# EAGLE board VacuumBox (EAGLE 7.2.0)
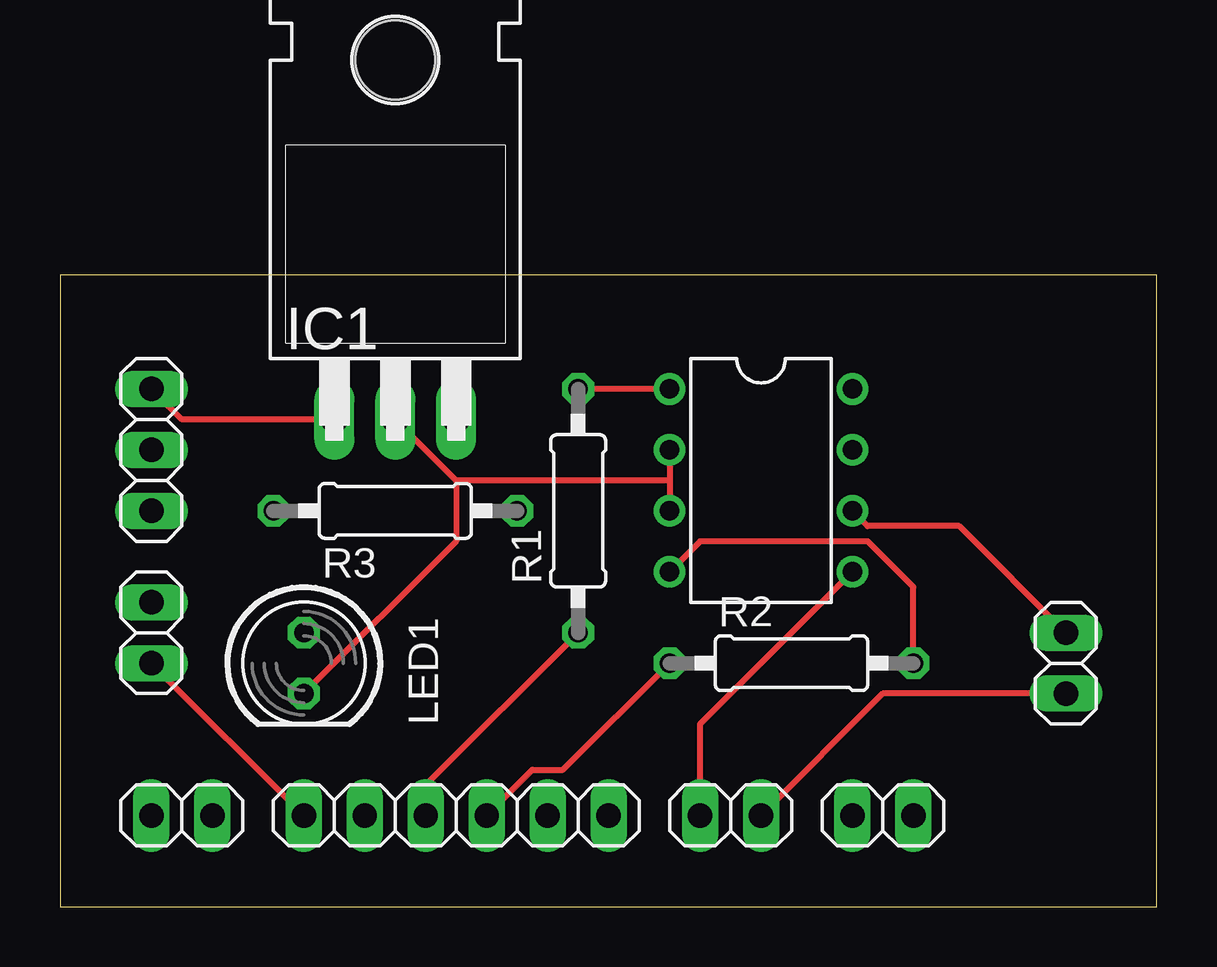
[diagram p0: board, top side]
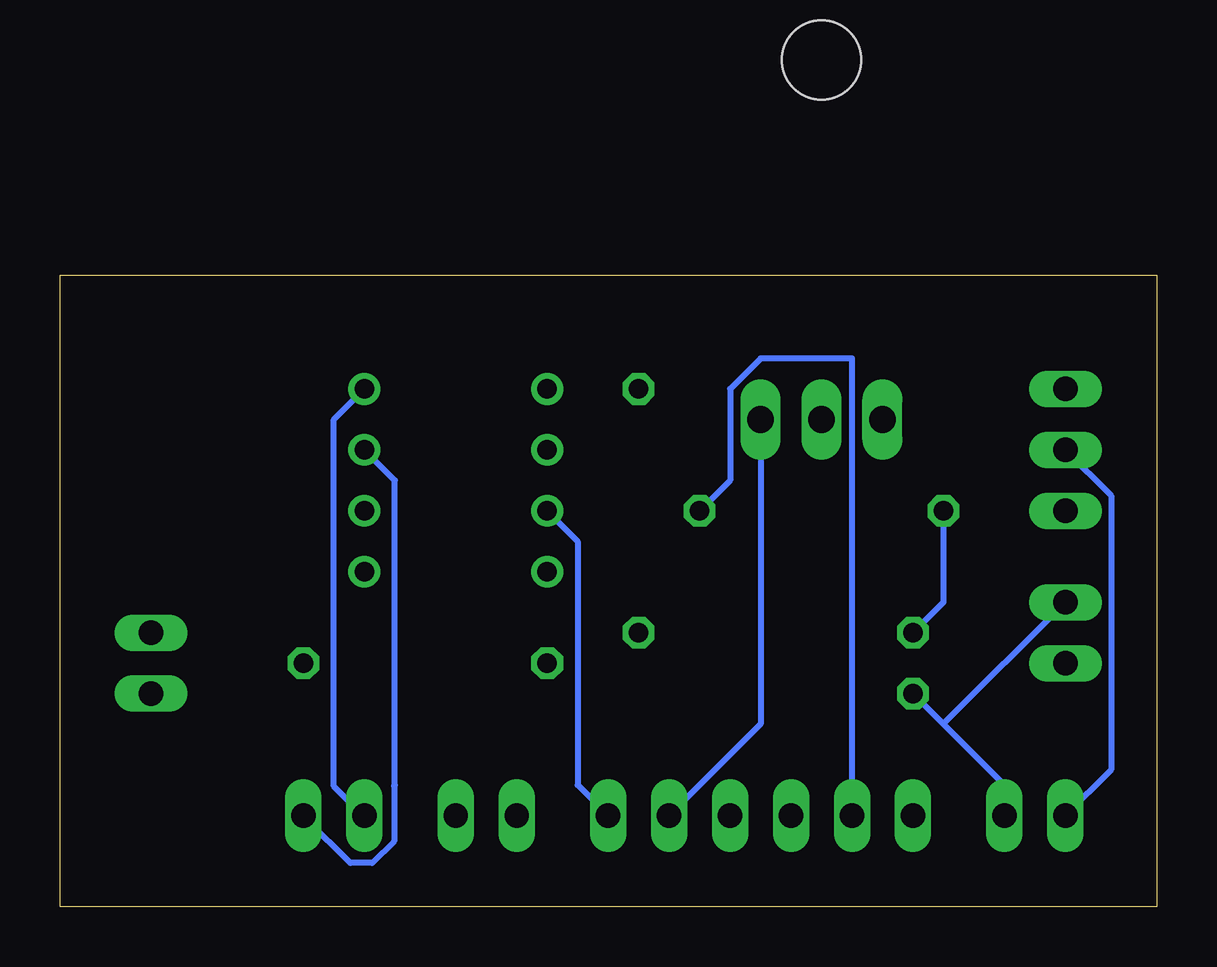
[diagram p1: board, bottom side, seen from below]

Size 45.7 x 26.34 mm. Coordinates in mm from the lower left corner, seen from the top.
Outline: 0,0 45.7,0 45.7,26.34 0,26.34 0,0
Copper layers (1*16): Top 0.035mm / dielectric 1.5mm / Bottom 0.035mm
Design rules "default": minimum track width 10mil, minimum drill 0.6mm, track to track 8mil, track to pad 8mil, pad to pad 8mil, via to via 8mil, smd to smd 8mil, copper to edge 40mil, drill to drill 8mil, minimum pad ring 10mil, minimum via ring 8mil, stop-mask expansion 4mil, vias tented up to drill 0mil, thermal gap 10mil

## Footprints (pad centres in the part's own frame; a part is rotated, then mirrored left to right if it is on the bottom)
TO220H = drill 1.118 long: 1 -2.54,-10.16; 2 0,-10.16; 3 2.54,-10.16 | hole 3.302: 0,4.826
1X02 = drill 1.016 long: 1 -1.27,0; 2 1.27,0
1X06 = drill 1.016 long: 1 -6.35,0; 2 -3.81,0; 3 -1.27,0; 4 1.27,0; 5 3.81,0; 6 6.35,0
LED5MM = drill 0.813 octagon: A -1.27,0; K 1.27,0
0207/10 = drill 0.813 octagon: 1 -5.08,0; 2 5.08,0
1X03 = drill 1.016 long: 1 -2.54,0; 2 0,0; 3 2.54,0
DIL08 = drill 0.813 pad 1.27: 1 -3.81,-3.81; 2 -1.27,-3.81; 3 1.27,-3.81; 4 3.81,-3.81; 5 3.81,3.81; 6 1.27,3.81; 7 -1.27,3.81; 8 -3.81,3.81

## Placement (x,y rotation side)
IC1  7805T  [TO220H]  13.97,30.48 0 top
JP1  REDIAL  [1X02]  34.29,3.81 0 top
JP2  ARDUINO  [1X06]  16.51,3.81 0 top
JP3  3.5mm JACK  [1X02]  41.91,10.16 270 top
JP4  HOOK  [1X02]  27.94,3.81 180 top
JP5  BAT  [1X02]  5.08,3.81 0 top
LED1  [LED5MM]  10.16,10.16 270 top
R1  500  [0207/10]  21.59,16.51 90 top
R2  500  [0207/10]  30.48,10.16 0 top
R3  500  [0207/10]  13.97,16.51 180 top
SW1  SPST  [1X02]  3.81,11.43 90 top
SW2  SPDT  [1X03]  3.81,19.05 90 top
U$1  TLP504A  [DIL08]  29.21,17.78 270 top

## Library data of the parts
IC1 = gm-regulators
JP1-JP5 SW1 SW2 = pinhead
LED1 = led
R1-R3 = rcl
U$1 = linear

## Nets
N$1: R1.2 U$1.1
N$2: R2.2 U$1.4
N$4: JP1.1 U$1.8
N$5: JP1.2 U$1.7
N$6: JP3.2 JP4.1
N$7: JP4.2 U$1.5
N$8: JP3.1 U$1.6
N$9: LED1.A R3.2
N$10: JP2.1 SW1.1
N$11: JP2.2 R3.1
N$12: JP2.3 R1.1
N$13: JP2.4 R2.1
N$14: IC1.3 JP2.5
N$15: IC1.2 JP2.6 JP5.2 LED1.K SW1.2 U$1.2 U$1.3
N$16: IC1.1 SW2.3
N$17: JP5.1 SW2.2

## Tracks (layer width: path | path; a pad name or v marks a point on that pad's centre or on a via)
N$1
  Top 0.254: U$1.1 R1.2
N$2
  Top 0.254: U$1.4 26.67,15.24 33.66,15.24 35.56,13.34 R2.2
N$4
  Bottom 0.254: U$1.8 34.29,20.32 34.29,5.03 33.15,3.89 JP1.1
N$5
  Bottom 0.254: U$1.7 31.75,17.78 31.75,5.08 31.77,5.03 31.77,2.74 32.69,1.83 33.6,1.83 35.43,3.66 JP1.2
N$6
  Top 0.254: JP4.1 34.29,8.89 JP3.2
N$7
  Top 0.254: U$1.5 26.67,7.62 JP4.2
N$8
  Top 0.254: U$1.6 33.66,15.88 37.47,15.88 JP3.1
N$9
  Bottom 0.254: LED1.A 8.89,12.7 R3.2
N$10
  Top 0.254: JP2.1 SW1.1
N$11
  Bottom 0.254: R3.1 17.78,17.78 17.78,21.59 16.51,22.86 12.7,22.86 JP2.2
N$12
  Top 0.254: R1.1 15.24,5.08 JP2.3
N$13
  Top 0.254: R2.1 20.95,5.71 19.68,5.71 JP2.4
N$14
  Bottom 0.254: JP2.5 16.51,7.62 IC1.3
N$15
  Top 0.254: U$1.2 25.4,17.78 | 25.4,17.78 U$1.3 | 16.51,17.78 IC1.2 | 25.4,17.78 16.51,17.78 | LED1.K 16.51,15.24 16.51,17.78
  Bottom 0.254: 8.89,7.62 6.35,5.08 JP5.2 | 8.89,7.62 LED1.K | 8.89,7.62 SW1.2 | JP2.6 24.13,5.08 24.13,15.24 U$1.3
N$16
  Top 0.254: SW2.3 5.08,20.32 IC1.1
N$17
  Bottom 0.254: JP5.1 1.91,5.71 1.91,17.14 SW2.2

## Text on the board
tValues: Left | Right | + | - | D2 | D3 | D4 | D9 | +5V | GND | + | - | + | -